# Altium PCB PCB1.PcbDoc
Units mm, origin at the board's own origin, x right, y up, seen from the top; angles counter-clockwise.
Board outline 152.4 x 101.6 mm, 2 copper layers (Top Layer, Bottom Layer); 43 components, 41 nets, 154 pads, 21 vias.
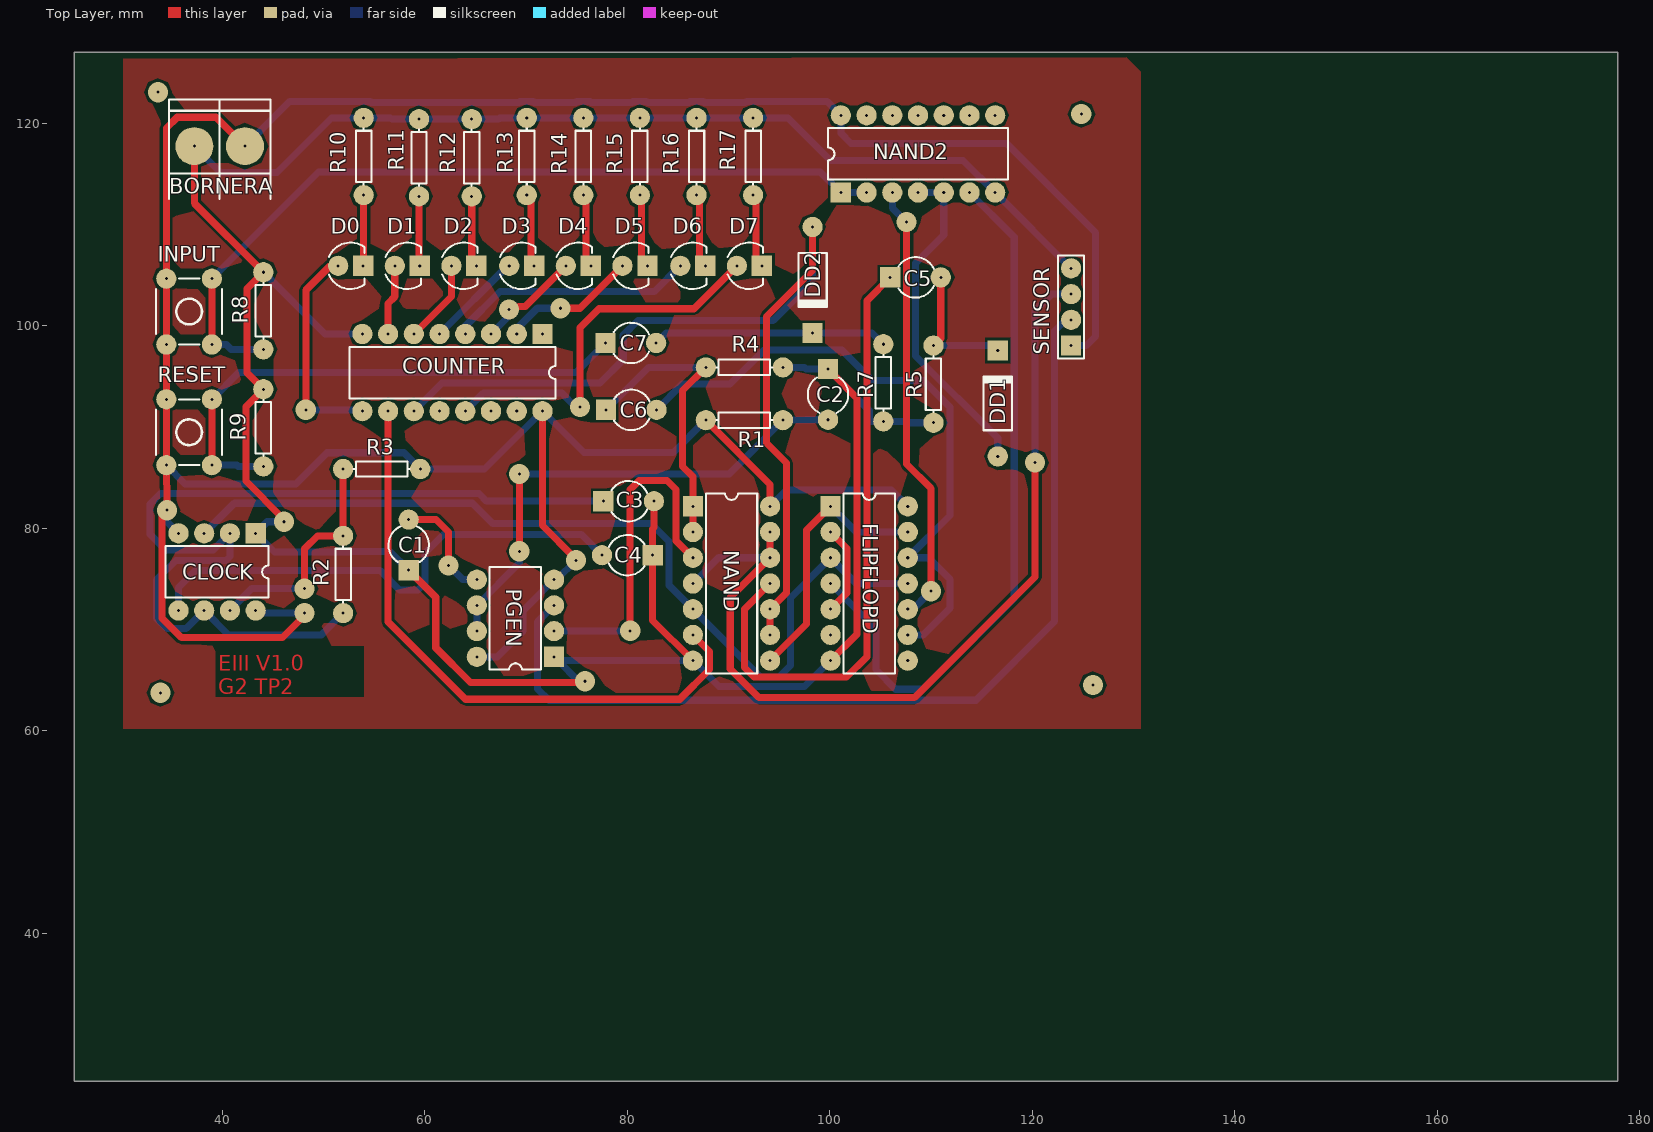
[diagram p0: Top Layer view]
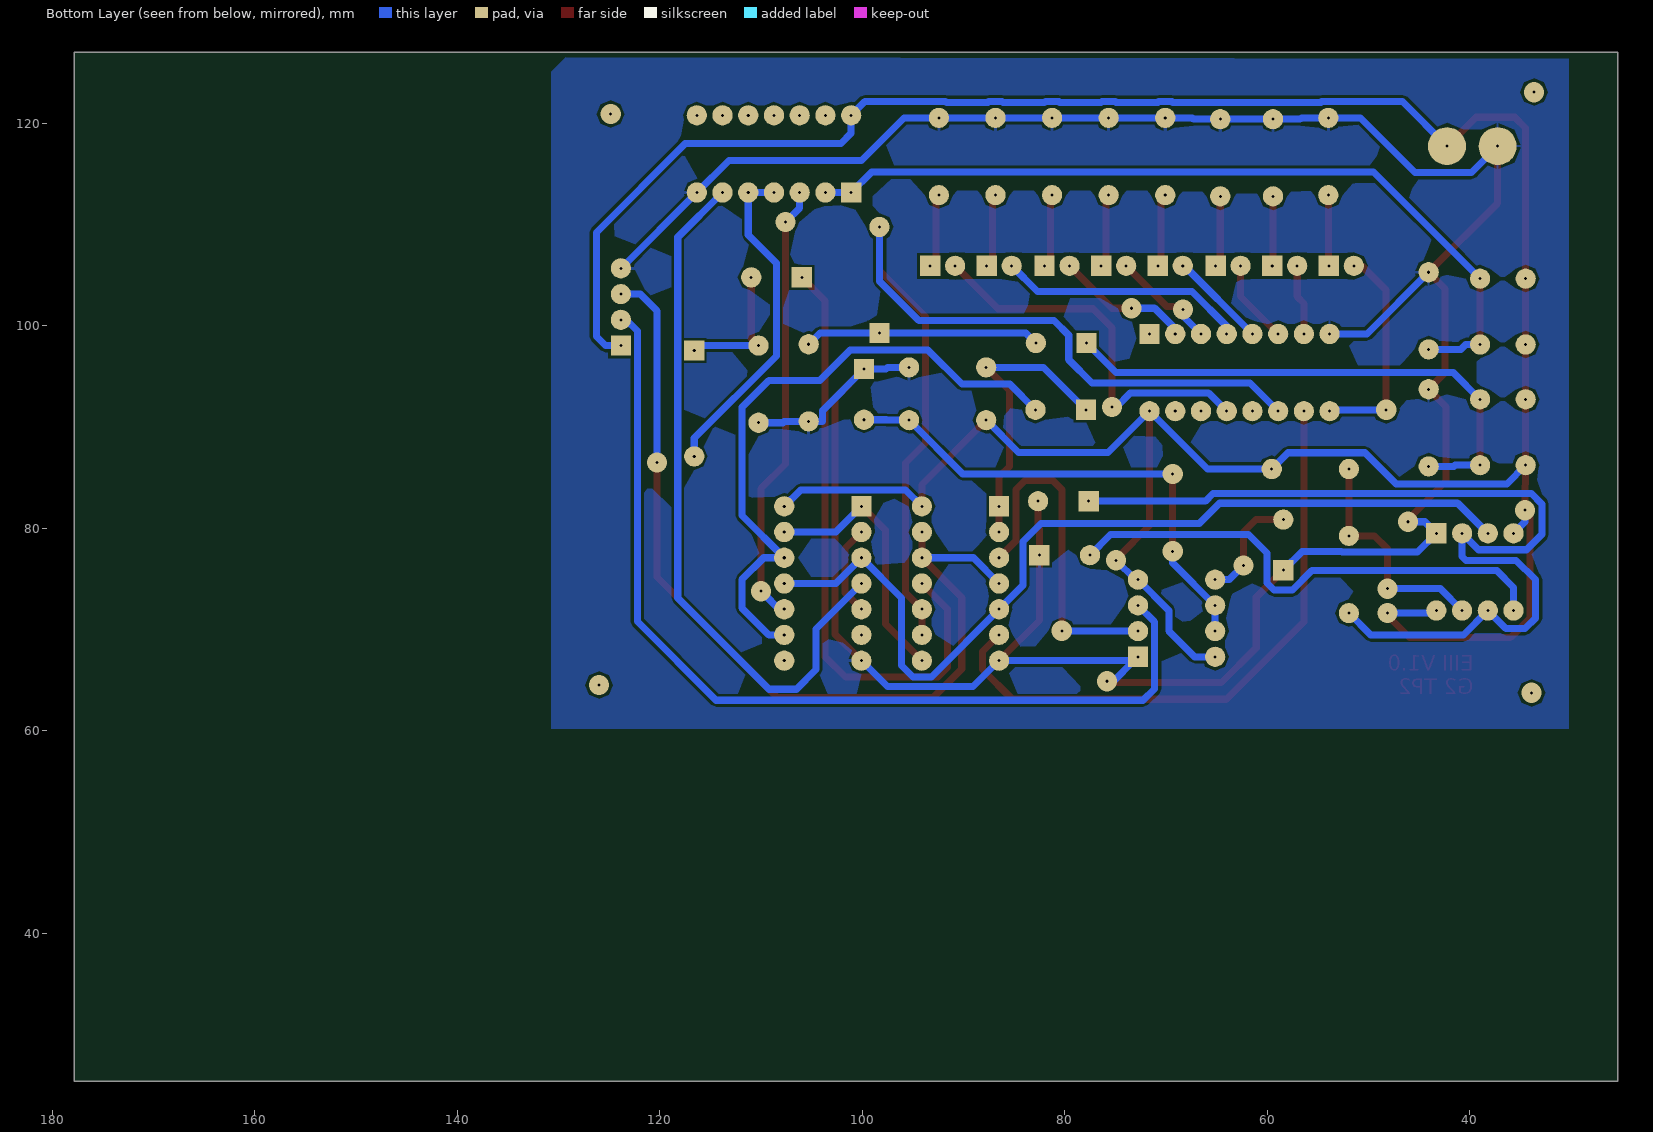
[diagram p1: Bottom Layer view, seen from below]

## Layer stack, top to bottom
Top Solder: solder mask 0.0102, Solder Resist, Dk 3.5
Top Layer: signal copper 0.0356
Dielectric 1: dielectric 0.32, FR-4, Dk 4.8
Bottom Layer: signal copper 0.0356
Bottom Solder: solder mask 0.0102, Solder Resist, Dk 3.5

## Board outline
25.4,25.4 177.8,25.4 177.8,127 25.4,127

## Design rules (kind name [scope] priority, off if disabled: settings)
Clearance [All] p1: gap=0.254 ignorepadtopadclearanceinfootprint=FALSE except(0: Arc-Hole Track-Hole SMDPad-Hole THPad-Hole Via-Hole Fill-Hole Poly-Hole Region-Hole Text-Hole)
PolygonConnect [All] p1: connectstyle=Relief reliefconductorwidth=0.254 reliefentries=4 polygonreliefangle="90 Angle" airgapwidth=0.254
RoutingVias [All] p1: holewidth=0.711 width=1.27 viastyle="Through Hole" minholewidth=0.711 minwidth=1.27 maxholewidth=0.711 maxwidth=1.27
SolderMaskExpansion [All] p1: expansion=0.102
Width [All] p1: maxlimit=0.7 minlimit=0.7 preferedwidth=0.7 minimp=50.000000 maximp=50.000000 favimp=50.000000
30 further rules are at their usual default settings.

## Components (designator, comment, footprint, x,y, rotation, side; value= is the part's Value field where it differs from the comment)
BORNERA "BORNERA 2" BORNERA2 39.751,117.729 r270 top
C1 "Cap2" CAPR5-4X5 58.42,78.359 r90 top value=10nF
C2 "Cap2" CAPR5-4X5 99.822,93.218 r270 top value=100nF
C3 "Cap2" CAPR5-4X5 80.137,82.677 r0 top value=15nF
C4 "Cap2" CAPR5-4X5 80.01,77.343 r180 top value=10nF
C5 "Cap2" CAPR5-4X5 108.458,104.775 r0 top value=1uF
C6 "Cap2" CAPR5-4X5 80.391,91.694 r0 top value=100pF
C7 "Cap2" CAPR5-4X5 80.351,98.298 r0 top value=1uF
CLOCK "LM555" DIP8 43.307,79.502 r270 top
COUNTER "74HC4040" DIP16 71.628,99.187 r270 top
D0 "LED" LED3 52.678,105.918 r0 top
D1 "LED" LED3 58.266,105.918 r0 top
D2 "LED" LED3 63.854,105.918 r0 top
D3 "LED" LED3 69.569,105.918 r0 top
D4 "LED" LED3 75.157,105.918 r0 top
D5 "LED" LED3 80.745,105.918 r0 top
D6 "LED" LED3 86.46,105.918 r0 top
D7 "LED" LED3 92.048,105.918 r0 top
DD1 "Diode 1N4001" DO-41 116.586,92.329 r90 top
DD2 "Diode 1N4001" DO-41 98.298,104.521 r270 top
FLIPFLOPD "74HC74" DIP14 100.076,82.169 r0 top
INPUT "TACT SWITCH" TACTSWITCH 36.739,101.398 r0 top
NAND "74HC00" DIP14 86.487,82.169 r0 top
NAND2 "74HC00" DIP14 101.092,113.157 r90 top
PGEN "LM555" DIP8 72.771,67.31 r180 top
R1 "Res1" AXIAL-0.3 91.567,90.678 r0 top value=470
R2 "Res1" AXIAL-0.3 51.943,75.438 r90 top value=5.1k
R3 "Res1" AXIAL-0.3 55.753,85.852 r0 top value=5.1
R4 "Res1" AXIAL-0.3 91.567,95.885 r0 top value=1K
R5 "Res1" AXIAL-0.3 110.236,94.234 r90 top value=20
R7 "Res1" AXIAL-0.3 105.283,94.361 r90 top value=20
R8 "Res1" AXIAL-0.3 44.069,101.473 r270 top value=4K
R9 "Res1" AXIAL-0.3 44.069,89.916 r270 top value=4K
R10 "Res1" AXIAL-0.3 53.975,116.713 r270 top value=220
R11 "Res1" AXIAL-0.3 59.436,116.586 r270 top value=220
R12 "Res1" AXIAL-0.3 64.643,116.586 r270 top value=220
R13 "Res1" AXIAL-0.3 70.077,116.713 r270 top value=220
R14 "Res1" AXIAL-0.3 75.665,116.713 r270 top value=220
R15 "Res1" AXIAL-0.3 81.253,116.713 r270 top value=220
R16 "Res1" AXIAL-0.3 86.841,116.713 r270 top value=220
R17 "Res1" AXIAL-0.3 92.429,116.713 r270 top value=220
RESET "TACT SWITCH" TACTSWITCH 36.739,89.483 r0 top
SENSOR "Header 4" HDR1X4 123.825,98.044 r90 top

## Footprints (in the part's own frame and the unit in brackets; to place one, negate y for a bottom-side part, rotate by r counter-clockwise, add the part's x,y. Pads: shape width x height; smd on the part's side, far side on the other; paste and mask are expansions set on the pad)
AXIAL-0.3 [mm] "Axial Device, Thru-Hole; 2 Leads; 0.3 in Pin Spacing"
  round 2 hole 0.3: 1(-3.81,0) 2(3.81,0)
  silkscreen extent -2.77,-0.76 2.77,0.76
BORNERA2 [mm] "Bornera con Tornillos 5mm separación"
  round 3.75 hole 0.3: 1(0,2.5) 2(0,-2.5)
  silkscreen extent -4.6,-5 5.2,5, body extent -3.76,-4.89 3.94,5.61, height 10
CAPR5-4X5 [mm] "Capacitor; 2 Leads"
  rect 2x2 hole 0.3: 1(-2.5,0)
  round 2 hole 0.3: 2(2.5,0)
  silkscreen extent -1.69,-2 1.82,2
DIP8 [mm]
  rect 2x2 hole 0.3: 1(0,0)
  round 2 hole 0.3: 2(0,-2.54) 3(0,-5.08) 4(0,-7.62) 5(7.62,-7.62) 6(7.62,-5.08) 7(7.62,-2.54) 8(7.62,0)
  silkscreen extent 1.27,-8.89 6.35,1.27, body extent -0.06,-9.21 7.7,1.59, height 4.5
DIP14 [mm]
  rect 2x2 hole 0.3: 1(0,0)
  round 2 hole 0.3: 2(0,-2.54) 3(0,-5.08) 4(0,-7.62) 5(0,-10.16) 6(0,-12.7) 7(0,-15.24) 8(7.62,-15.24) 9(7.62,-12.7) 10(7.62,-10.16) 11(7.62,-7.62) 12(7.62,-5.08) 13(7.62,-2.54) 14(7.62,0)
  silkscreen extent 1.27,-16.51 6.35,1.27, body extent -0.13,-17.14 7.75,1.9, height 4.19
DIP16 [mm]
  rect 2x2 hole 0.3: 1(0,0)
  round 2 hole 0.3: 2(0,-2.54) 3(0,-5.08) 4(0,-7.62) 5(0,-10.16) 6(0,-12.7) 7(0,-15.24) 8(0,-17.78) 9(7.62,-17.78) 10(7.62,-15.24) 11(7.62,-12.7) 12(7.62,-10.16) 13(7.62,-7.62) 14(7.62,-5.08) 15(7.62,-2.54) 16(7.62,0)
  silkscreen extent 1.27,-19.05 6.35,1.27, body extent -0.08,-18.89 7.79,1.11, height 1.98
DO-41 [mm] "Diode, Axial; Body 5.2 x 2.7 mm (LxDia. max), Lead Dia. 0.86 mm (max)"
  round 2 hole 0.3: 1(-5.23,0)
  rect 2x2 hole 0.3: 2(5.23,0)
  silkscreen extent -2.65,-1.4 2.75,1.4
HDR1X4 [mm] "Connector; Header; 4 Position"
  rect 2x2 hole 0.3: 1(0,0)
  round 2 hole 0.3: 2(2.54,0) 3(5.08,0) 4(7.62,0)
  silkscreen extent -1.27,-1.27 8.89,1.27
LED3 [mm]
  round 2 hole 0.3: 1(-1.219,0)
  rect 2x2 hole 0.3: 2(1.245,0)
  silkscreen extent -2.13,-2.3 1.36,2.3, body extent -1.65,-1.63 1.65,1.66, height 0.49
TACTSWITCH [mm]
  round 2 hole 0.3: 1(-2.25,-3.25) 2(-2.25,3.25) 3(2.25,-3.25) 4(2.25,3.25)
  silkscreen extent -3.25,-3.25 3.25,3.25, body extent -3.05,-3.95 3.15,3.95, height 7

## Part data
C1 C2 C3 C4 C5 C6 C7: "Capacitor", PackageDescription="Capacitor; 2 Leads", PackageReference=CAPR5-4X5, Published=23-Sep-2002, Publisher="Altium Limited"
CLOCK PGEN: "Timer"
COUNTER: library part IC_DIP16
DD1 DD2: "1 Amp General Purpose Rectifier", Code_JEDEC=DO-204-AL, ComponentLink1Description="Manufacturer Link", ComponentLink1URL=http://www.fairchildsemi.com/, ComponentLink2Description=Datasheet, ComponentLink2URL=http://www.fairchildsemi.com/ds/1N%2F1N4001.pdf, DatasheetVersion=1998, LatestRevisionDate=17-Jul-2002, LatestRevisionNote="Re-released for DXP Platform.", PackageDescription="Diode, Axial; Body 5.2 x 2.7 mm (LxDia. max), Lead Dia. 0.86 mm (max)", PackageReference=DO-41, PackageVersion=Aug-1999, Published=8-Jun-2000, Publisher="Altium Limited"
FLIPFLOPD NAND NAND2: library part IC_DIP14
R1 R2 R3 R4 R5 R7 R8 R9 R10 R11 R12 R13 R14 R15 R16 R17: "Resistor", LatestRevisionDate=17-Jul-2002, LatestRevisionNote="Re-released for DXP Platform.", PackageDescription="Axial Device, Thru-Hole; 2 Leads; 0.3 in Pin Spacing", PackageReference=AXIAL-0.3, Published=8-Jun-2000, Publisher="Altium Limited"
SENSOR: "Header, 4-Pin", LatestRevisionDate=17-Jul-2002, LatestRevisionNote="Re-released for DXP Platform.", Publisher="Altium Limited"

## Via types
v1: diameter 2, hole 0.3, Top Layer to Bottom Layer, 21 vias

## Nets (pads, with @x,y where several pads share a name; then routed paths per layer and width w, separated by ;. In a path a pad name is that pad's centre, name@x,y a point inside that pad or via, vN(x,y) a via of type N, cw(c..) or ccw(c..) an arc to the next point about the centre after c; other vN are vias at no path point)
CLK: CLOCK.3 FLIPFLOPD.3 FLIPFLOPD.11 NAND.5 | length 90.2
  Bottom Layer w0.7: CLOCK.3 41.199,82.474 64.719,82.474 66.712,80.481 82.333,80.481 84.125,78.689 84.125,74.371 NAND.5 93.171,65.325 94.996,65.325 96.114,66.443 96.114,73.127 FLIPFLOPD.3 102.616,74.549 FLIPFLOPD.11
CPN: COUNTER.10 NAND.6 | length 61
  Top Layer w0.7: COUNTER.10 56.388,70.764 64.033,63.119 85.192,63.119 88.113,66.04 88.113,67.843 NAND.6
DELTAIN: NAND.3 PGEN.2 | length 34.2
  Top Layer w0.7: v1(80.289,69.875) 80.289,83.82 81.178,84.709 83.922,84.709 84.811,83.82 84.811,78.765 NAND.3
  Bottom Layer w0.7: PGEN.2 72.796,69.875 v1(80.289,69.875)
ECHO: NAND.4 NAND.12 NAND.13 SENSOR.3 | length 90.5
  Top Layer w0.7: NAND.13 NAND.12 90.17,73.152 90.17,66.116 92.989,63.297 108.382,63.297 120.269,75.184 v1(120.269,86.487)
  Bottom Layer w0.7: NAND.4 89.027,77.089 NAND.12 ; v1(120.269,86.487) 120.269,101.473 121.92,103.124 SENSOR.3
ECHON: C5.1 NAND.11 | length 61.1
  Top Layer w0.7: NAND.11 91.567,72.009 91.567,66.243 92.507,65.303 101.651,65.303 103.657,67.31 103.657,102.474 C5.1
GND: BORNERA.2 C1.1 C2.1 C3.2 C4.1 CLOCK.1 COUNTER.8 FLIPFLOPD.7 NAND2.7 NAND.7 PGEN.1 R4.2 R5.1 R7.1 R8.1 R9.1 R10.1 R11.1 R12.1 R13.1 R14.1 R15.1 R16.1 R17.1 SENSOR.4 | length 295.3
  Top Layer w0.7: BORNERA.2 37.251,112.101 R8.1 42.443,103.657 42.443,95.352 R9.1 42.342,91.999 42.342,84.658 v1@45.974,81.026 ; C1.1 61.087,73.192 61.087,68.199 64.516,64.77 v1@75.438,64.77 ; C3.2 82.637,80.061 82.51,79.934 C4.1 82.51,70.906 NAND.7 ; C2.1 102.667,92.873 102.667,69.52 FLIPFLOPD.7
  Bottom Layer w0.7: BORNERA.2 39.842,115.138 45.415,115.138 50.8,120.523 R10.1 56.642,120.523 56.769,120.396 R11.1 R12.1 67.285,120.396 67.412,120.523 R13.1 R14.1 R15.1 R16.1 R17.1 95.885,120.523 100.076,116.332 113.157,116.332 NAND2.7 SENSOR.4 ; R8.1 50.165,99.187 COUNTER.8 ; v1(46.101,80.645) 44.45,80.645 CLOCK.1 45.165,77.644 52.607,77.644 52.687,77.724 56.555,77.724 C1.1 ; PGEN.1 PGEN.1@73.152,66.929 ; v1(75.819,64.897) 75.184,64.897 PGEN.1@73.152,66.929 ; R4.2 97.511,95.885 97.678,95.718 C2.1 103.937,91.603 103.937,90.551 R7.1 107.696,90.551 107.823,90.424 R5.1 ; FLIPFLOPD.7 97.518,64.371 89.045,64.371 NAND.7 PGEN.1@73.152,66.929
INPUT: C6.2 FLIPFLOPD.9 FLIPFLOPD.12 | length 63.5
  Bottom Layer w0.7: C6.2 85.431,94.234 90.145,94.234 93.497,97.587 101.194,97.587 104.191,94.59 109.22,94.59 111.862,91.948 111.862,81.255 FLIPFLOPD.12 109.728,77.089 111.887,74.93 111.887,72.136 109.22,69.469 FLIPFLOPD.9
INPUTUSER: INPUT.3 INPUT.4 NAND2.1 NAND2.2 R8.2 | length 81.6
  Top Layer w0.7: INPUT.3 INPUT.4
  Bottom Layer w0.7: INPUT.3 40.412,98.148 40.897,97.663 R8.2 ; INPUT.4 49.53,115.189 99.06,115.189 NAND2.1 NAND2.2
INPUTUSERN: FLIPFLOPD.10 NAND2.3 | length 43.6
  Top Layer w0.7: v1(107.569,110.236) 107.569,86.36 109.982,83.947 v1(109.982,73.787)
  Bottom Layer w0.7: NAND2.3 106.172,111.633 v1(107.569,110.236) ; FLIPFLOPD.10 108.204,72.009 v1@109.728,73.533
MEASURE_READY: FLIPFLOPD.2 FLIPFLOPD.5 | length 9
  Top Layer w0.7: FLIPFLOPD.5 101.702,73.635 101.702,78.003 FLIPFLOPD.2
NetC1_2: C1.2 PGEN.5 | length 10.7
  Top Layer w0.7: C1.2 61.127,80.859 62.357,79.629 v1@62.357,76.708
  Bottom Layer w0.7: v1(62.357,76.327) 63.754,74.93 PGEN.5
NetC2_2: C2.2 PGEN.6 PGEN.7 R1.2 | length 49.7
  Top Layer w0.7: v1@69.342,77.978 v1(69.342,85.369)
  Bottom Layer w0.7: PGEN.7 PGEN.6 69.342,76.581 v1(69.342,77.724) ; v1(69.342,85.369) 90.068,85.369 R1.2 97.561,90.678 97.601,90.718 C2.2
NetC3_1: C3.1 CLOCK.2 CLOCK.6 R2.1 | length 93.4
  Bottom Layer w0.7: R2.1 49.784,69.469 40.64,69.469 CLOCK.6 36.449,70.104 34.544,70.104 33.528,71.12 33.528,74.93 35.433,76.835 40.386,76.835 40.767,77.216 CLOCK.2 39.141,77.876 34.392,77.876 32.893,79.375 32.893,82.405 33.915,83.428 65.365,83.428 66.116,82.677 C3.1
NetC4_2: C4.2 CLOCK.5 | length 50.4
  Bottom Layer w0.7: CLOCK.5 35.687,74.168 37.338,75.819 55.606,75.819 57.511,73.914 59.329,73.914 60.024,74.609 60.024,77.55 61.849,79.375 75.478,79.375 C4.2
NetC5_2: C5.2 DD1.2 R5.2 | length 13.6
  Top Layer w0.7: R5.2 110.958,98.766 C5.2
  Bottom Layer w0.7: R5.2 116.101,98.044 DD1.2
NetC6_1: C6.1 NAND.1 NAND.2 R4.1 | length 29.2
  Top Layer w0.7: NAND.2 NAND.1 86.487,85.09 85.471,86.106 85.471,93.599 R4.1
  Bottom Layer w0.7: C6.1 82.082,95.885 R4.1
NetC7_2: C7.2 DD2.2 R7.2 | length 23.3
  Bottom Layer w0.7: C7.2 83.844,99.291 DD2.2 104.163,99.291 R7.2
NetCLOCK_7: CLOCK.7 R2.2 R3.1 | length 23.1
  Top Layer w0.7: v1(48.133,74.041) 48.133,77.978 49.403,79.248 R2.2 R3.1
  Bottom Layer w0.7: CLOCK.7 42.926,74.041 v1(48.133,74.041)
NetD0_2: D0.2 R10.2 | length 7
  Top Layer w0.7: D0.2 53.975,105.97 R10.2
NetD1_2: D1.2 R11.2 | length 6.9
  Top Layer w0.7: R11.2 59.436,105.993 D1.2
NetD2_2: D2.2 R12.2 | length 7
  Top Layer w0.7: R12.2 64.643,106.374 D2.2
NetD3_2: D3.2 R13.2 | length 7.3
  Top Layer w0.7: R13.2 70.485,112.495 70.485,106.247 D3.2
NetD4_2: D4.2 R14.2 | length 7.3
  Top Layer w0.7: R14.2 75.946,112.622 75.946,106.374 D4.2
NetD5_2: D5.2 R15.2 | length 7.3
  Top Layer w0.7: R15.2 81.407,112.749 81.407,106.501 D5.2
NetD6_2: D6.2 R16.2 | length 7.3
  Top Layer w0.7: R16.2 87.122,112.622 87.122,106.501 D6.2
NetD7_2: D7.2 R17.2 | length 7.3
  Top Layer w0.7: R17.2 92.71,112.622 92.71,106.501 D7.2
Q0: COUNTER.9 D0.1 | length 21.9
  Top Layer w0.7: v1@48.26,91.44 v1(48.26,91.694) 48.26,103.505 50.673,105.918 D0.1
  Bottom Layer w0.7: v1(48.26,91.694) 53.721,91.694 COUNTER.9
Q1: COUNTER.7 D1.1 | length 7
  Top Layer w0.7: COUNTER.7 56.388,102.21 57.047,102.868 D1.1
Q2: COUNTER.6 D2.1 | length 8.3
  Top Layer w0.7: COUNTER.6 62.635,102.894 D2.1
Q3: COUNTER.5 D3.1 | length 9.7
  Bottom Layer w0.7: COUNTER.5 68.199,105.918 D3.1
Q4: COUNTER.3 D4.1 | length 9.5
  Top Layer w0.7: v1@69.266,101.905 69.925,101.905 D4.1
  Bottom Layer w0.7: COUNTER.3 68.326,100.965 v1(68.326,101.6)
Q5: COUNTER.2 D5.1 | length 13.9
  Top Layer w0.7: COUNTER.2 COUNTER.2@69.088,99.568 ; v1(73.406,101.727) 75.335,101.727 D5.1
  Bottom Layer w0.7: COUNTER.2 69.088,99.695 71.12,101.727 v1(73.406,101.727)
Q6: COUNTER.4 D6.1 | length 24.5
  Bottom Layer w0.7: COUNTER.4 64.008,99.949 67.437,103.378 82.701,103.378 D6.1
Q7: COUNTER.13 D7.1 | length 38.5
  Top Layer w0.7: v1(75.336,91.973) 75.336,99.797 77.216,101.676 86.587,101.676 D7.1
  Bottom Layer w0.7: COUNTER.13 65.786,93.345 73.533,93.345 74.905,91.973 v1(75.336,91.973)
RESET: COUNTER.11 DD2.1 NAND.9 NAND.10 | length 95.1
  Top Layer w0.7: NAND.9 NAND.10 95.733,73.635 95.733,86.436 93.751,88.417 93.751,100.914 98.298,105.461 DD2.1
  Bottom Layer w0.7: COUNTER.11 61.722,94.361 77.318,94.361 79.604,96.647 79.604,99.06 81.051,100.508 94.412,100.508 98.298,104.394 DD2.1
RESETINPUT: C7.1 R9.2 RESET.3 RESET.4 | length 52.8
  Top Layer w0.7: RESET.3 RESET.4
  Bottom Layer w0.7: RESET.3 41.453,86.233 41.58,86.106 R9.2 ; RESET.4 41.633,95.377 74.93,95.377 C7.1
RESETN: FLIPFLOPD.1 FLIPFLOPD.13 NAND.8 | length 26.4
  Top Layer w0.7: NAND.8 97.714,70.536 97.714,79.807 FLIPFLOPD.1
  Bottom Layer w0.7: FLIPFLOPD.1 102.616,79.629 FLIPFLOPD.13
SET: DD1.1 NAND2.4 NAND2.5 | length 33.1
  Bottom Layer w0.7: NAND2.4 NAND2.5 111.252,108.966 108.458,106.172 108.458,97.028 116.586,88.9 DD1.1
SETN: FLIPFLOPD.4 NAND2.6 | length 70.4
  Bottom Layer w0.7: FLIPFLOPD.4 104.572,70.053 104.572,66.04 106.502,64.11 109.195,64.11 118.212,73.127 118.212,108.737 NAND2.6
TRIG: PGEN.3 SENSOR.2 | length 94.4
  Bottom Layer w0.7: PGEN.3 71.145,70.764 71.145,64.135 72.263,63.017 114.427,63.017 122.199,70.79 122.199,99.466 123.317,100.584 SENSOR.2
VCC: BORNERA.1 CLOCK.4 CLOCK.8 COUNTER.16 FLIPFLOPD.14 INPUT.1 INPUT.2 NAND2.14 NAND.14 PGEN.4 PGEN.8 R1.1 R3.2 RESET.1 RESET.2 SENSOR.1 | length 304.7
  Top Layer w0.7: v1(34.544,81.788) 34.061,81.305 34.061,71.12 35.966,69.215 45.974,69.215 v1@48.133,71.374 ; v1@34.544,82.296 RESET.1 RESET.2 INPUT.1 INPUT.2 34.489,119.513 35.56,120.584 39.396,120.584 BORNERA.1 ; COUNTER.16 71.628,80.264 v1@74.803,77.089 ; R1.1 94.107,84.328 NAND.14
  Bottom Layer w0.7: RESET.1 36.34,84.382 47.265,84.382 50.339,87.456 57.959,87.456 R3.2 65.913,85.852 COUNTER.16 75.717,87.478 84.557,87.478 R1.1 ; v1(34.544,81.788) 34.544,80.645 CLOCK.4 ; BORNERA.1 46.649,122.127 54.639,122.127 54.719,122.047 69.333,122.047 69.413,122.127 70.741,122.127 70.821,122.047 74.921,122.047 75.001,122.127 76.329,122.127 76.409,122.047 80.509,122.047 80.589,122.127 81.917,122.127 81.997,122.047 86.097,122.047 86.177,122.127 87.505,122.127 87.585,122.047 91.685,122.047 91.765,122.127 99.742,122.127 NAND2.14 101.092,118.999 102.108,117.983 117.475,117.983 126.238,109.22 126.238,98.933 125.349,98.044 SENSOR.1 ; CLOCK.8 43.561,71.628 v1(48.133,71.628) ; PGEN.8 67.183,67.31 69.723,69.85 69.723,71.882 PGEN.4 73.025,74.93 v1(74.93,76.835) ; NAND.14 95.733,83.795 106.07,83.795 FLIPFLOPD.14
pads on no net: COUNTER.1 COUNTER.12 COUNTER.14 COUNTER.15 FLIPFLOPD.6 FLIPFLOPD.8 NAND2.8 NAND2.9 NAND2.10 NAND2.11 NAND2.12 NAND2.13
copper on no net:
  other v1: 33.909,63.754 125.984,64.516 124.841,120.904 33.655,123.063

## Polygon pours and split planes (outlines as drawn)
GND on Bottom Layer (solid, pour order 26): 30.226,126.365 30.226,60.198 130.683,60.198 130.683,126.492
no net on Top Layer (solid, pour order 28): 30.226,126.365 30.226,60.198 30.353,60.198 130.683,60.198 130.683,126.494

## Other copper
Top Layer:
  text "EIII V1.0 / G2 TP2" at 39.624,63.627 h1.52